# EAGLE board shield_sporecollector v4 (EAGLE 9.1.0)
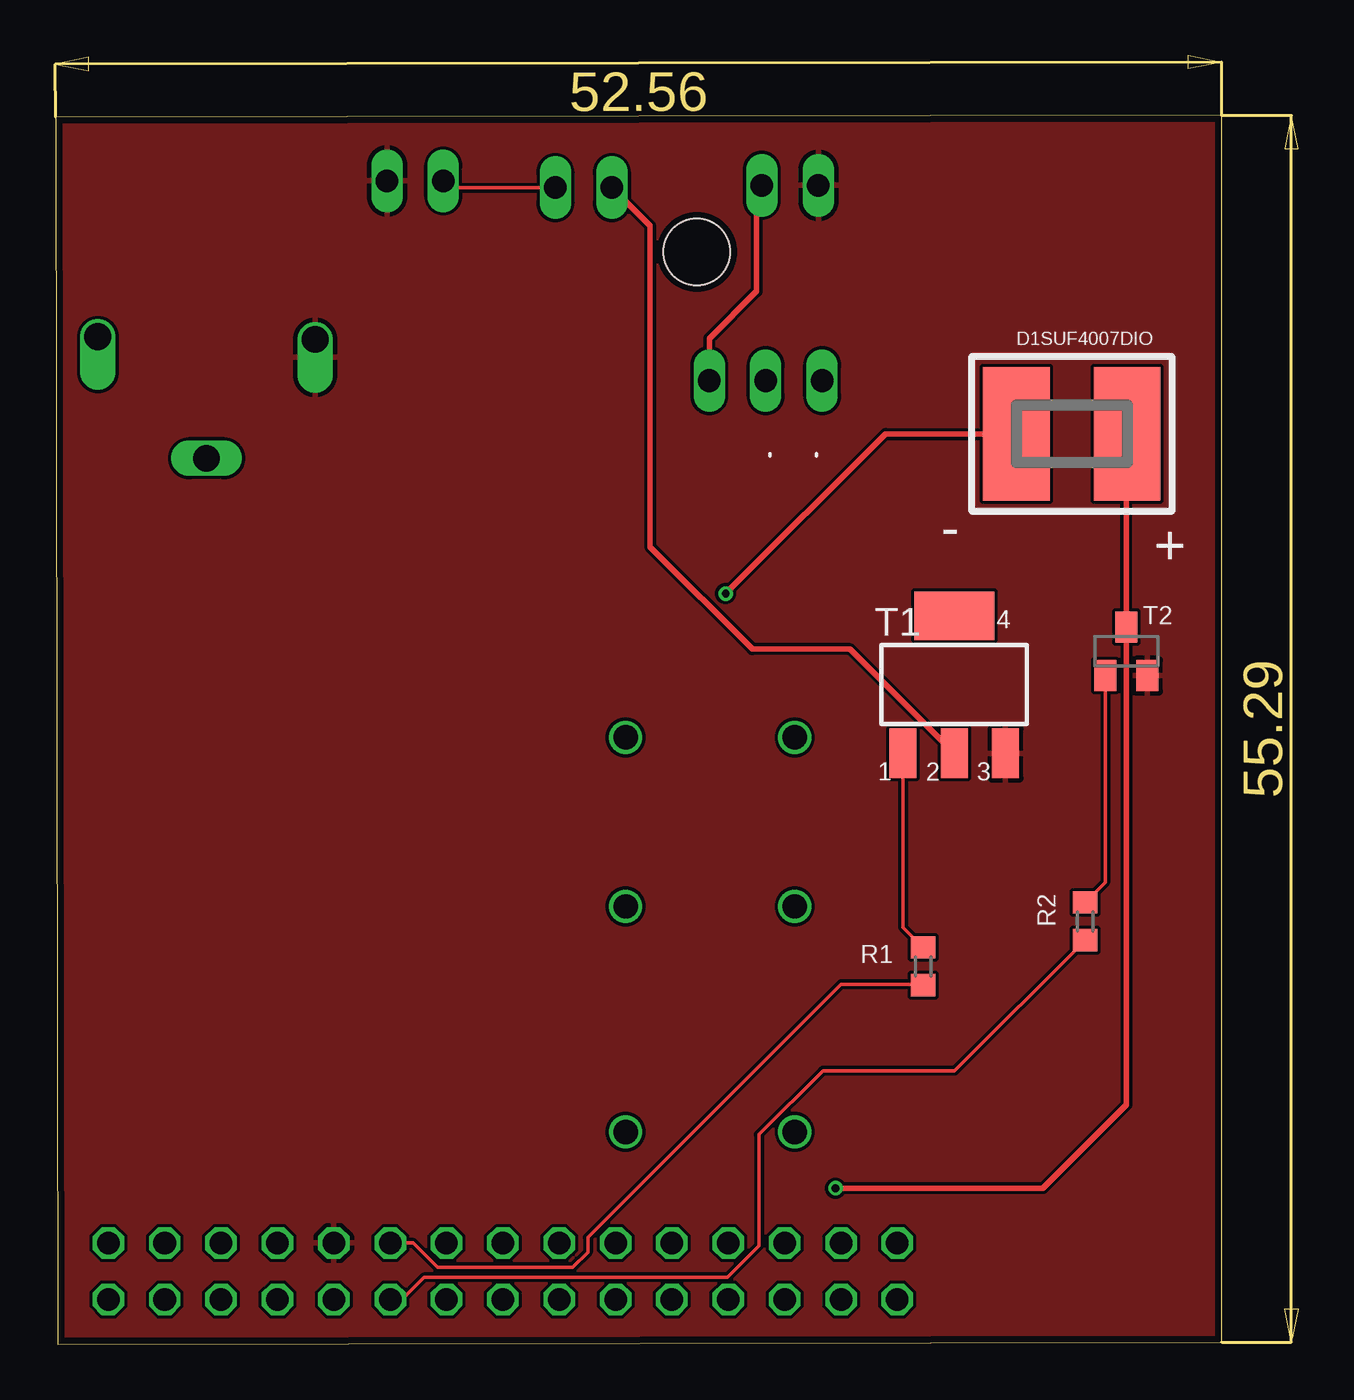
[diagram p0: board, top side]
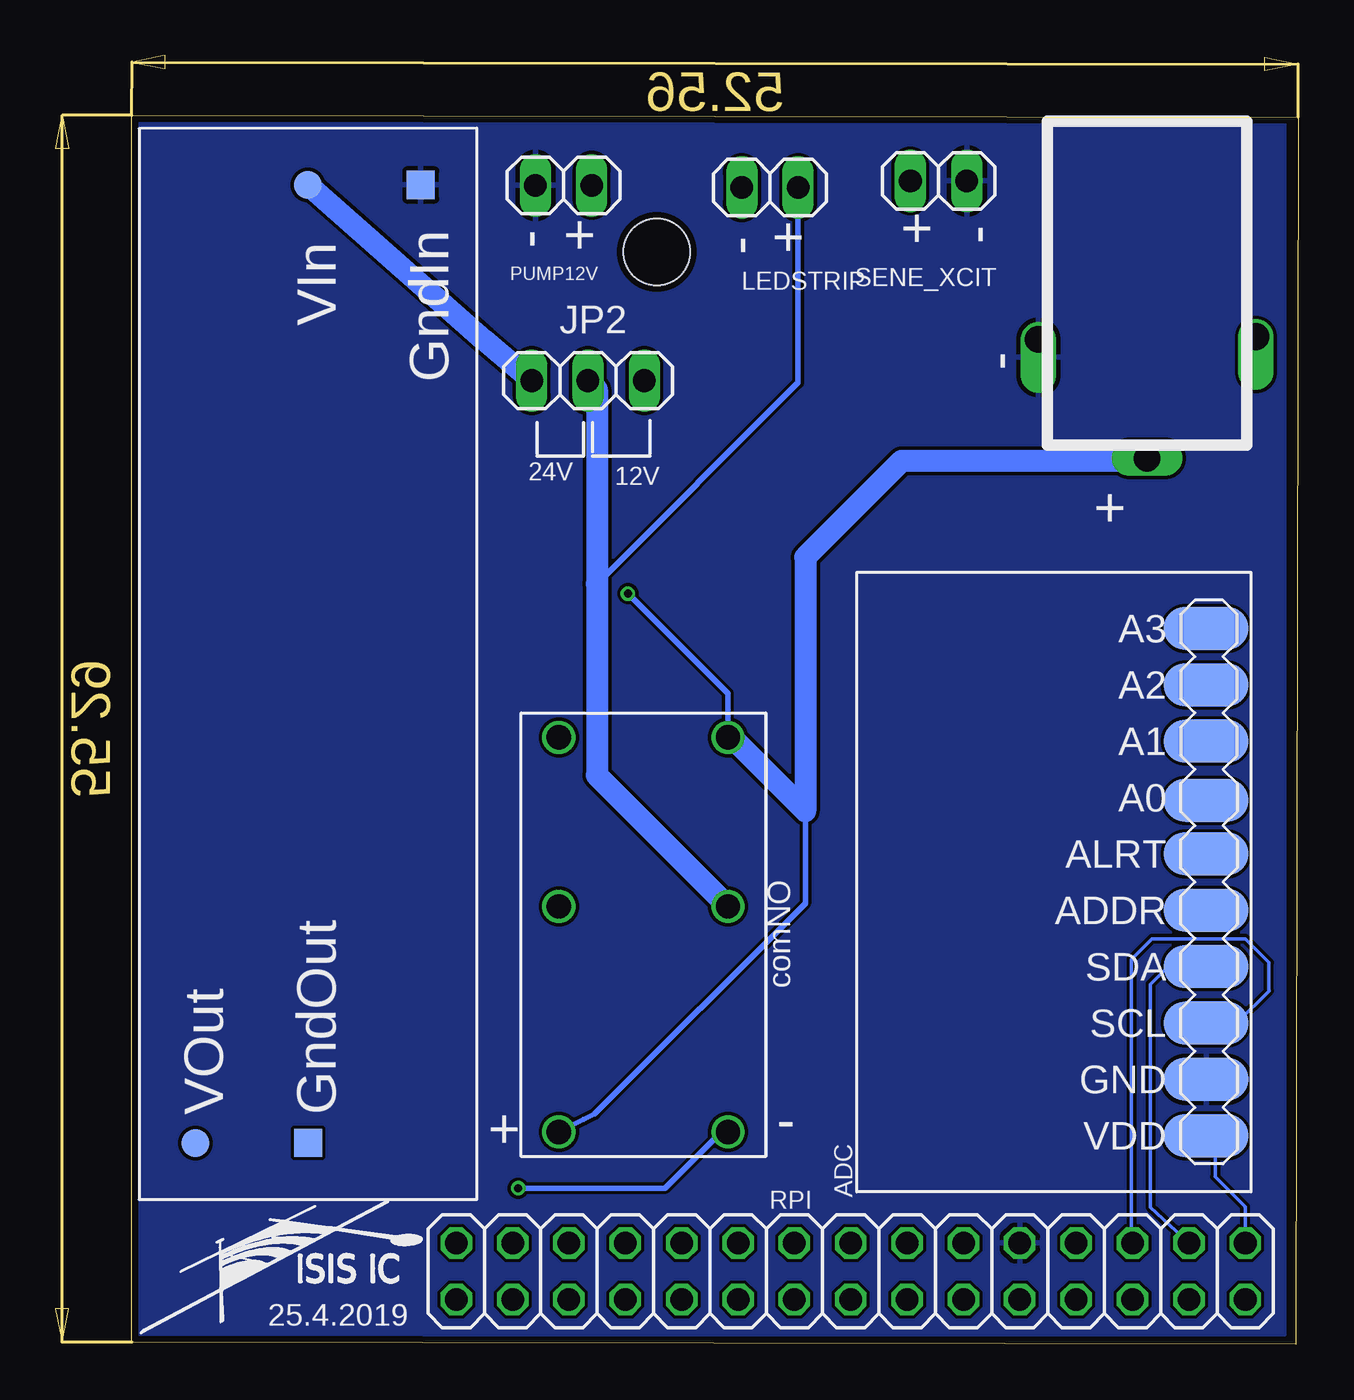
[diagram p1: board, bottom side, seen from below]

Size 52.56 x 55.38 mm. Coordinates in mm from the lower left corner, seen from the top.
Outline: 0.1,0 52.56,0.09 52.56,55.38 0,55.29 0.1,0
Copper layers (1*16): Top 0.035mm / dielectric 1.5mm / Bottom 0.035mm
Design rules "PCB-POOL Standard": minimum track width 0.15mm, minimum drill 0.3mm, track to track 0.15mm, track to pad 0.15mm, pad to pad 0.15mm, via to via 0.15mm, smd to smd 0.15mm, copper to edge 0.3mm, drill to drill 0.2mm, minimum pad ring 0.2mm, minimum via ring 0.15mm, stop-mask expansion 0.075mm, vias tented up to drill 0mil, thermal gap 0.2mm
Holes 3 mm at 28.9,49.22

## Footprints (pad centres in the part's own frame; a part is rotated, then mirrored left to right if it is on the bottom)
BUCHSE9.8X14.6 = drill 1.2 offset: P$1 9.72,9.4; P$3 9.85,-0.4 | drill 1.2 long: P$2 15.2,4.5
SUF4007 = smd 3 x 6: A -2.5,0; C 2.5,0
1X03 = drill 1.016 long: 1 -2.54,0; 2 0,0; 3 2.54,0
1X02 = drill 1.016 long: 1 -1.27,0; 2 1.27,0
R0603 = smd 1 x 1.1: 1 -0.85,0; 2 0.85,0
2X15 = drill 1.016 octagon: 1 -17.78,-1.27; 2 -17.78,1.27; 3 -15.24,-1.27; 4 -15.24,1.27; 5 -12.7,-1.27; 6 -12.7,1.27; 7 -10.16,-1.27; 8 -10.16,1.27; 9 -7.62,-1.27; 10 -7.62,1.27; 11 -5.08,-1.27; 12 -5.08,1.27; 13 -2.54,-1.27; 14 -2.54,1.27; 15 0,-1.27; 16 0,1.27; 17 2.54,-1.27; 18 2.54,1.27; 19 5.08,-1.27; 20 5.08,1.27; 21 7.62,-1.27; 22 7.62,1.27; 23 10.16,-1.27; 24 10.16,1.27; 25 12.7,-1.27; 26 12.7,1.27; 27 15.24,-1.27; 28 15.24,1.27; 29 17.78,-1.27; 30 17.78,1.27
STEP-UP24VSMD = smd 1.27 x 1.27: GNDIN 45.72,2.54; GNDOUT 2.54,7.62; VIN 45.72,7.62; VOUT 2.54,12.7
SOT223 = smd 1.219 x 2.235: 1 -2.311,-3.099; 2 0,-3.099; 3 2.311,-3.099 | smd 3.6 x 2.2: 4 0,3.099
SOT23 = smd 1 x 1.4: 1 -0.95,-1.1; 2 0.95,-1.1; 3 0,1.1
ADC-4CH-ADS1115/WITHOUTHOLES = smd 3.81 x 1.93: P$1 -6.858,11.43; P$2 -6.858,8.89; P$3 -6.858,6.35; P$4 -6.858,3.81; P$5 -6.858,1.27; P$6 -6.858,-1.27; P$7 -6.858,-3.683; P$8 -6.858,-6.35; P$9 -6.858,-8.89; P$10 -6.858,-11.43
G6B-2114P = drill 1.1: 1 -10.16,3.81; 2 0,3.81; 3 7.62,3.81; 4 -10.16,-3.81; 5 0,-3.81; 6 7.62,-3.81

## Placement (x,y rotation side)
BUCHSE12VINPUT  BUCHSE9.8X14.6  [BUCHSE9.8X14.6]  11.3,55.12 270 bottom
D1SUF4007DIO  SUF4007DIO  [SUF4007]  45.8,41.02 180 top
JP2  [1X03]  32,43.42 0 bottom
LEDSTRIP  [1X02]  23.8,52.12 180 bottom
PUMP12V  [1X02]  33.1,52.22 0 bottom
R1  500 ohm  [R0603]  39.1,17.02 90 top
R2  500 ohm  [R0603]  46.4,19.05 90 top
RPI  [2X15]  20.16,3.28 180 bottom
SENE_XCIT  [1X02]  16.2,52.42 0 bottom
STEPUP12TO24V  24VSTEPUPPOLOLUSMDSMD  [STEP-UP24VSMD]  37,6.52 90 bottom
T1  [SOT223]  40.5,29.72 0 top
T2  BC847  [SOT23]  48.26,31.22 0 top
U$3  ADC-4CH-ADS1115/WITHOUTHOLESADC-ADS1115WITHOUTHOLES  [ADC-4CH-ADS1115/WITHOUTHOLES]  11,20.82 180 bottom
U$4  G6B-2114POMRON  [G6B-2114P]  29.5,19.72 90 bottom

## Library data of the parts
BUCHSE12VINPUT = Buchse
D1SUF4007DIO = diode
JP2 LEDSTRIP PUMP12V RPI SENE_XCIT = pinhead
R1 R2 = resistor
STEPUP12TO24V = pololu24stepup
T1 = zetex_
T2 = transistor
U$3 = diy-modules
U$4 = G6B2114PUSDC12

## Nets
+COM1: JP2.2 LEDSTRIP.1 SENE_XCIT.1 U$4.5
GND: BUCHSE12VINPUT.P$3 PUMP12V.1 RPI.9 SENE_XCIT.2 STEPUP12TO24V.GNDIN T1.3 T2.2 U$3.P$2
N$1: R2.2 T2.1
N$2: R1.2 T1.1
N$3: BUCHSE12VINPUT.P$2 D1SUF4007DIO.C U$4.1 U$4.6
N$4: JP2.3 PUMP12V.2
N$5: JP2.1 STEPUP12TO24V.VIN
RELAY_T3_-_COIL: D1SUF4007DIO.A T2.3 U$4.4
RPIOUT_LEDSTRP: R1.1 RPI.11
RPIOUTRELAY: R2.1 RPI.12
SCL: RPI.5 U$3.P$3
SDA: RPI.3 U$3.P$4
TO_T_C: LEDSTRIP.2 T1.2
VCC3.3: RPI.1 U$3.P$1

## Tracks (layer width: path | path; a pad name or v marks a point on that pad's centre or on a via)
+COM1
  Top 0.152: LEDSTRIP.1 17.77,52.12 SENE_XCIT.1
  Bottom 0.25: LEDSTRIP.1 22.53,43.32 31.59,34.26 31.6,34.26
  Bottom 1: JP2.2 31.6,43.02 31.6,34.26 31.6,25.63 29.75,23.78 U$4.5
GND
  pour Top: 0.4,55.22 52.3,55.22 52.3,0.32 0.4,0.32
  pour Bottom: 0.6,55.12 52.2,55.12 52.2,0.42 0.6,0.42
N$1
  Top 0.152: R2.2 47.31,20.81 T2.1
N$2
  Top 0.152: T1.1 38.19,18.78 R1.2
N$3  (via drill 0.35)
  Top 0.25: v30.2,33.82 37.4,41.02 D1SUF4007DIO.C
  Bottom 0.152: 25.7,27.32 U$4.6 25.52,27.34
  Bottom 0.25: 25.7,27.32 25.7,29.32 v30.2,33.82 | 22.2,24.02 22.2,19.87 31.7,10.37 32.2,10.12 U$4.1
  Bottom 1: 25.52,27.34 22.2,24.02 22.2,35.47 17.87,39.79 6.93,39.79 BUCHSE12VINPUT.P$2
N$4
  Top 0.152: PUMP12V.2 31.59,51.98
  Top 0.25: 31.59,51.98 31.59,47.45 29.46,45.31 JP2.3
N$5
  Bottom 1: STEPUP12TO24V.VIN 36.68,45.24 JP2.1
RELAY_T3_-_COIL  (via drill 0.35)
  Top 0.152: 48.26,40.98 D1SUF4007DIO.A
  Top 0.25: 48.26,40.98 T2.3 48.26,10.78 44.5,7.02 v35.15,7.02
  Bottom 0.25: v35.15,7.02 28.53,7.02 25.99,9.56 U$4.4
RPIOUT_LEDSTRP
  Top 0.152: RPI.11 16.12,4.55 17.21,3.46 23.31,3.46 23.99,4.14 23.99,4.8 35.41,16.22 39.05,16.22 R1.1
RPIOUTRELAY
  Top 0.152: RPI.12 15.62,2.01 16.61,3 30.28,3 31.7,4.42 31.7,9.44 34.58,12.31 40.52,12.31 R2.1
SCL
  Bottom 0.152: RPI.5 7.51,4.6 7.51,17.34 6.58,18.27 2.39,18.27 1.32,17.2 1.32,15.94 1.3,15.92 2.75,14.47 U$3.P$3
SDA
  Bottom 0.152: RPI.3 6.65,6.17 6.65,16.21 5.26,17.6 U$3.P$4
TO_T_C
  Top 0.25: T1.2 35.81,31.31 31.4,31.31 26.8,35.92 26.8,50.4 LEDSTRIP.2
VCC3.3
  Bottom 0.152: U$3.P$1 3.73,8.82 3.73,7.55 2.38,6.19 RPI.1

## Text on the board
bPlace: 12V | 24V
tNames: - | +
bNames: - | - | - | + | + | + | - | + | comNO | ADC | - | + | 25.4.2019